# Altium PCB PCB.PcbDoc
Units mm, origin at the board's own origin, x right, y up, seen from the top; angles counter-clockwise.
Board outline 17.81 x 15.52 mm, 2 copper layers (Top Layer, Bottom Layer); 21 components, 29 nets, 79 pads, 23 vias.
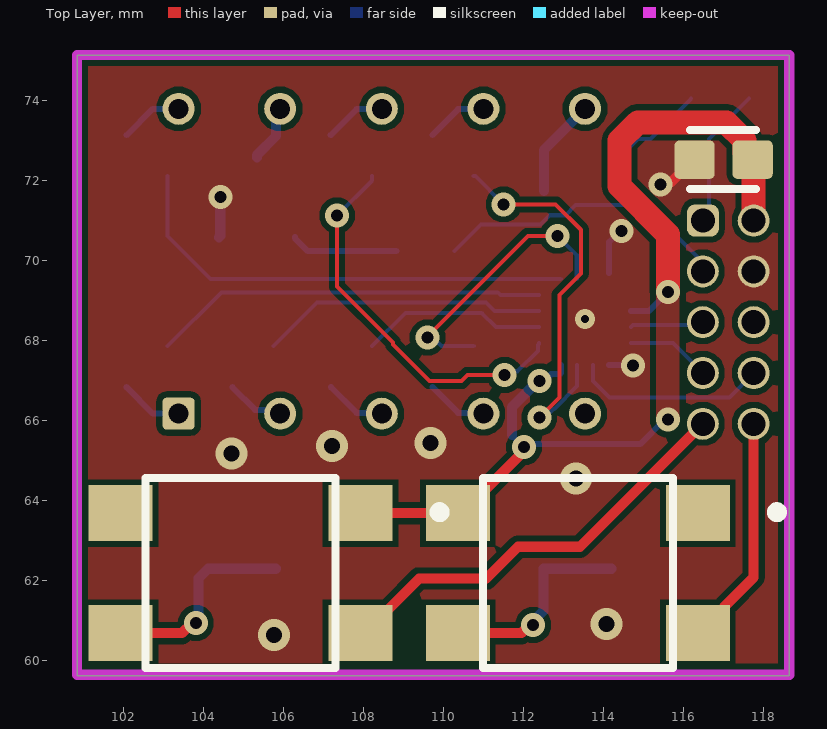
[diagram p0: Top Layer view]
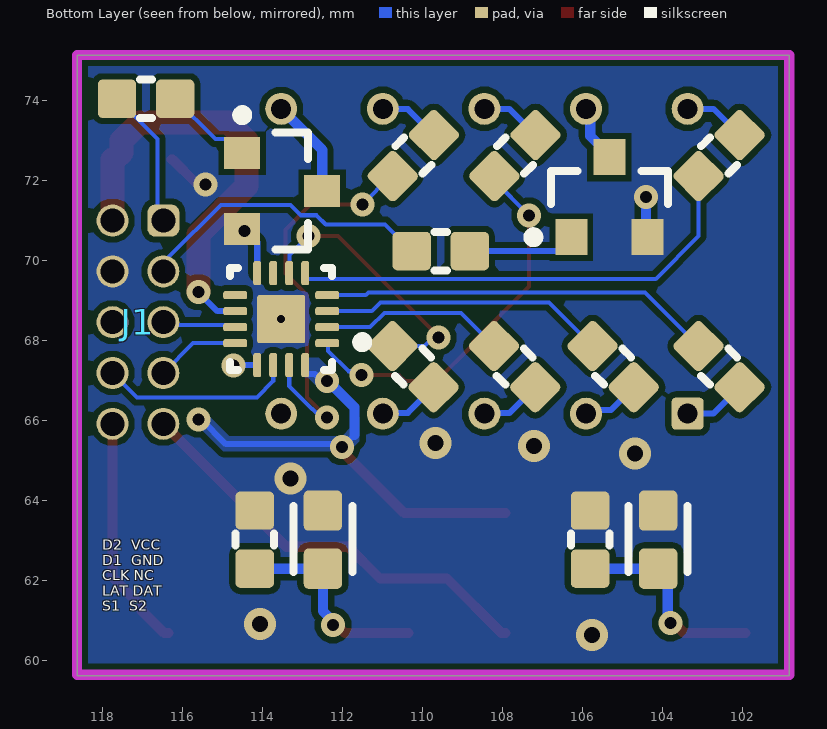
[diagram p1: Bottom Layer view, seen from below]
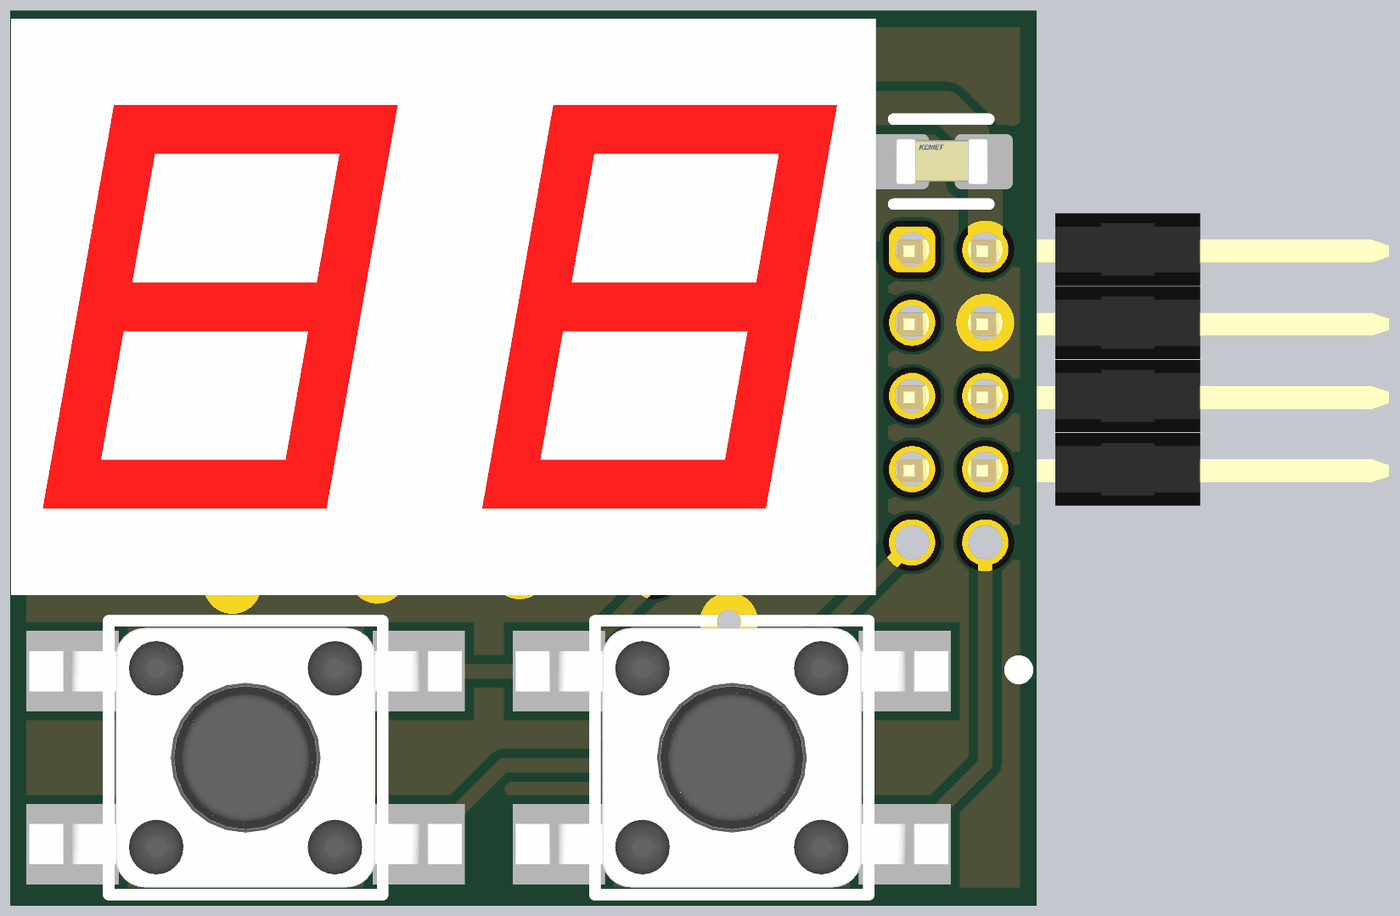
[diagram p2: 3D render of the assembled board from above, using the file's embedded part models]
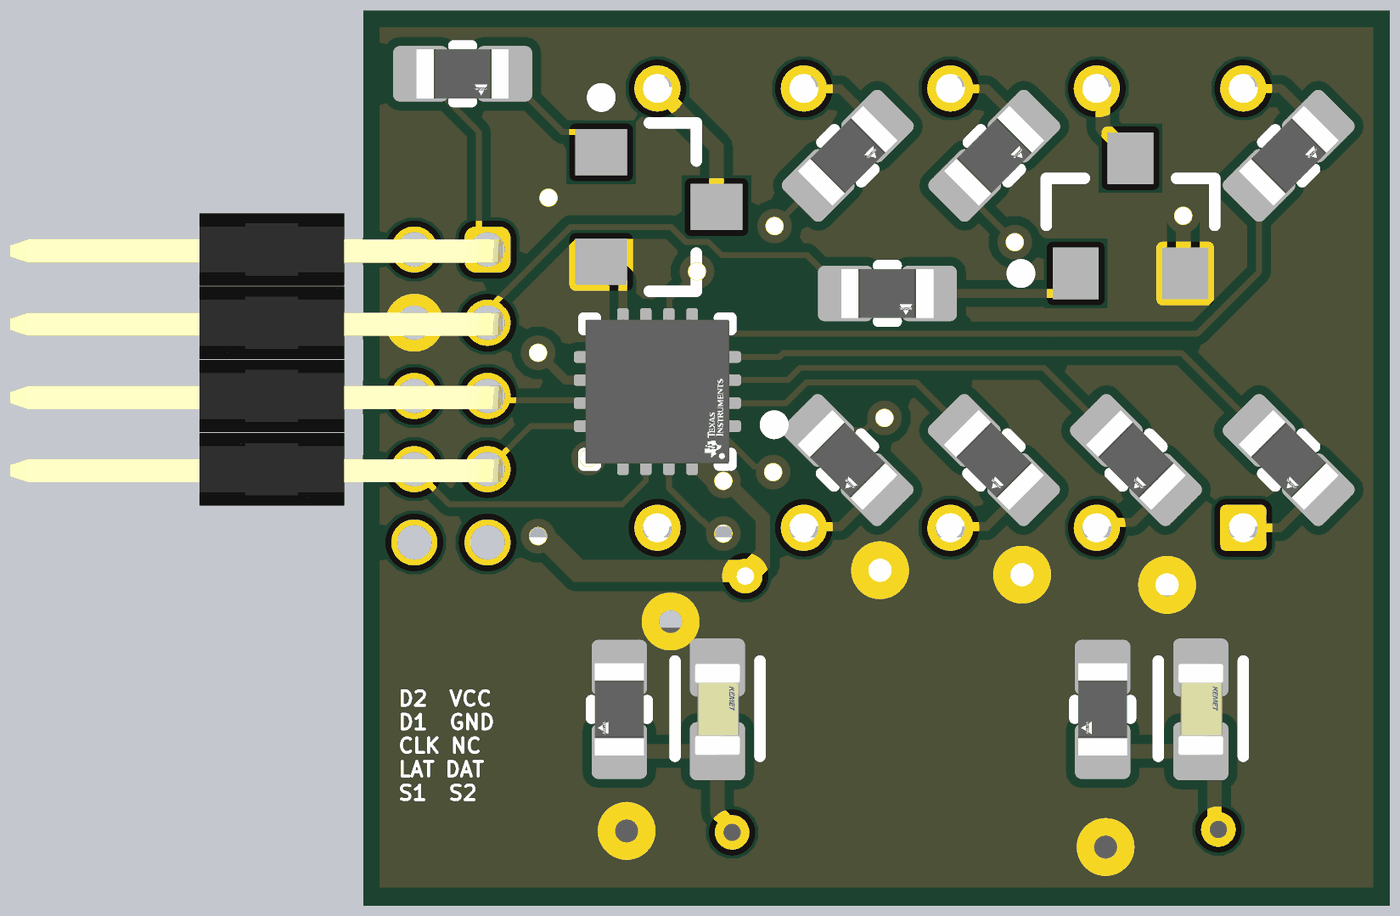
[diagram p3: 3D render of the assembled board from below, using the file's embedded part models]

## Layer stack, top to bottom
Top Solder: solder mask 0.0102, Solder Resist, Dk 3.5
Top Layer: signal copper 0.0356
Dielectric 1: dielectric 0.32, FR-4, Dk 4.8
Bottom Layer: signal copper 0.0356
Bottom Solder: solder mask 0.0102, Solder Resist, Dk 3.5

## Board outline
100.838,59.614 118.643,59.614 118.643,75.133 100.838,75.133

## Design rules (kind name [scope] priority, off if disabled: settings)
Clearance [All] p1: gap=0.152 ignorepadtopadclearanceinfootprint=TRUE
PolygonConnect [All] p1: connectstyle=Direct reliefconductorwidth=0.254 reliefentries=4 polygonreliefangle="90 Angle" airgapwidth=0.254
RoutingVias [All] p1: holewidth=0.3 width=0.6 viastyle="Through Hole" minholewidth=0.3 minwidth=0.6 maxholewidth=1 maxwidth=1.5
SolderMaskExpansion [All] p1: expansion=0.102 istentingtop=FALSE
UnRoutedNet [All] p1: checkbadconnections=TRUE
Width [All] p1: maxlimit=1.27 minlimit=0.102 preferedwidth=0.152
29 further rules are at their usual default settings.

## Components (designator, comment, footprint, x,y, rotation, side; value= is the part's Value field where it differs from the comment)
C1 "1uF" C0603C-IPC_B 117.003,72.517 r0 top
C2 "?F" C0603C-IPC_B 104.115,63.017 r270 bottom
C3 "?F" C0603C-IPC_B 112.497,63.017 r270 bottom
D1 "7SEG_028_DUAL_CC" 7SEG_2DIGIT_028INCH 103.378,66.167 r0 top locked
J1 "HDRM_2x5_127_90" HDRM_2x05J_90 116.484,70.993 r0 bottom
Q1 "BC817-16LT1G" ONSC-SOT-23-3-318-08_V 105.334,71.577 r90 bottom
Q2 "BC817-16LT1G" ONSC-SOT-23-3-318-08_V 113.513,71.73 r180 bottom
R1 "RC-0603" RC0603-IPC_B 110.236,72.619 r135 bottom
R2 "RC-0603" RC0603-IPC_B 107.696,72.619 r135 bottom
R3 "RC-0603" RC0603-IPC_B 107.702,67.341 r225 bottom
R4 "RC-0603" RC0603-IPC_B 105.238,67.341 r225 bottom
R5 "RC-0603" RC0603-IPC_B 102.591,67.341 r225 bottom
R6 "RC-0603" RC0603-IPC_B 102.591,72.619 r135 bottom
R7 "RC-0603" RC0603-IPC_B 110.242,67.341 r225 bottom
R8 "RC-0603" RC0603-IPC_B 109.55,70.231 r180 bottom
R9 "RC-0603" RC0603-IPC_B 116.916,74.041 r180 bottom
R10 "RC-0603" RC0603-IPC_B 105.816,63.017 r270 bottom
R11 "RC-0603" RC0603-IPC_B 114.198,63.017 r270 bottom
SW1 "Tactile 4.5x4.5" Tactile_45x45_SMD 104.927,62.179 r180 top
SW2 "Tactile 4.5x4.5" Tactile_45x45_SMD 113.36,62.179 r180 top
U1 "SN74HC595BRWNR" FP-RWN0016A-MFG 113.538,68.529 r0 bottom

## Footprints (in the part's own frame and the unit in brackets; to place one, negate y for a bottom-side part, rotate by r counter-clockwise, add the part's x,y. Pads: shape width x height; smd on the part's side, far side on the other; paste and mask are expansions set on the pad)
7SEG_2DIGIT_028INCH [mm]
  rrect25% 0.8x0.8 hole 0.5: 1(0,0)
  round 0.8 hole 0.5: 2(2.54,0) 3(5.08,0) 4(7.62,0) 5(10.16,0) 6(10.16,7.62) 7(7.62,7.62) 8(5.08,7.62) 9(2.54,7.62) 10(0,7.62)
  body extent -2.52,-1.17 12.48,8.83, height 6.2
C0603C-IPC_B [mm] "Chip Capacitor, 2-Leads, Body 1.60x0.80mm, IPC Medium Density"
  rrect25% 1.007x0.958 smd paste+0 mask+0: 1(-0.726,0) 2(0.726,0)
  silkscreen extent -0.84,-0.74 0.81,0.74, body extent -0.8,-0.4 0.8,0.4, height 0.87
FP-RWN0016A-MFG [mm]
  rrect50% 0.6x0.2 smd paste+0 mask+0: 1(-1.15,0.6) 2(-1.15,0.2) 3(-1.15,-0.2) 4(-1.15,-0.6) 9(1.15,-0.6) 10(1.15,-0.2) 11(1.15,0.2) 12(1.15,0.6)
  rrect50% 0.2x0.6 smd paste+0 mask+0: 5(-0.6,-1.15) 6(-0.2,-1.15) 7(0.2,-1.15) 8(0.6,-1.15) 13(0.6,1.15) 14(0.2,1.15) 15(-0.2,1.15) 16(-0.6,1.15)
  rrect8% 1.2x1.2 smd paste-1000 mask+0: 17(0,0)
  silkscreen extent -2.15,-1.28 1.28,1.28, body extent -1.25,-1.25 1.25,1.25, height 0.5
HDRM_2x05J_90 [mm] "Gold 250V 1A Shrouded Square Pins 1mm 260? 4mm -40?~+105? 6 1.27mm Brass Black 2x5P 1.27mm Push-Pull,P=1.27mm Pin Headers ROHS"
  rrect50% 0.8x0.8 hole 0.6: 1(0,0)
  round 0.8 hole 0.6: 2(1.27,0) 3(0,1.27) 4(1.27,1.27) 5(0,2.54) 6(1.27,2.54) 7(0,3.81) 8(1.27,3.81) 9(0,5.08) 10(1.27,5.08)
  body extent -0.25,-0.63 8.28,4.44, height 5.47
ONSC-SOT-23-3-318-08_V [mm] "SOT23, 3-Leads, Body 2.92x1.3mm, Pitch 0.95mm"
  rect 0.9x0.8 smd: 1(-1,0.95) 2(-1,-0.95) 3(1,0)
  silkscreen extent -1.12,-1.46 0.65,2.03, body extent -0.65,-1.46 0.65,1.46, height 1.11
RC0603-IPC_B [mm] "Chip Resistor, 2-Leads, Body 1.65x0.95mm, IPC Medium Density"
  rrect25% 0.958x0.962 smd paste+0 mask+0: 1(-0.727,0) 2(0.727,0)
  silkscreen extent -0.15,-0.48 0.15,0.48, body extent -0.8,-0.42 0.8,0.42, height 0.55
Tactile_45x45_SMD [mm]
  rect 1.6x1.4 smd paste+0 mask+0: 1(-3,-1.5) 2(3,-1.5) 3(-3,1.5) 4(3,1.5)
  silkscreen extent -5.1,-2.37 2.37,2.37, body extent -4.5,-2.47 4.5,2.47, height 0.25

## Part data
C1: library part Cap_0603, "0603 Multilayer Ceramic Capacitors MLCC - SMD/SMT ROHS", Voltage Rated=25V
C2 C3: library part Cap_0603, "0603 Multilayer Ceramic Capacitors MLCC - SMD/SMT ROHS", Voltage Rated=?V
D1: library part 2821AS, "Common-Cathode (CC)", Datasheet=https://www.thegioiic.com/sn410281n-led-7-doan-0-28inch-do-2-so-duong-chung
J1: "Gold 250V 1A Shrouded Square Pins 1mm 260? 4mm -40?~+105? 6 1.27mm Brass Black 2x5P 1.27mm Push-Pull,P=1.27mm Pin Headers ROHS"
Q1 Q2: library part CMP-1048-00736-1, "General Purpose Transistor, NPN Silicon, 3-Pin SOT-23, Pb-Free, Tape and Reel", Manufacturer="On Semiconductor", ComponentLink1Description="Manufacturer URL", ComponentLink1URL=http://www.onsemi.com/, ComponentLink2Description=Datasheet, ComponentLink2URL=http://www.onsemi.com/pub_link/Collateral/BC817-16LT1-D.PDF, ComponentLink3Description="Package Specification", ComponentLink3URL=http://www.onsemi.cn/pub_link/Collateral/318-08.PDF, DatasheetVersion="Rev. 12", fT Min (MHz)=100, IC Continuous (A)=0.5, Mounting Technology="Surface Mount", PackageDescription="3-Pin Small Outline Transistor, Body 2.92 x 1.3 mm, Pitch 0.95 mm", PackageReference=SOT-23-3-318-08, PackageVersion="Rev. AP, 11/2009", Packing="Tape and Reel", PartNumber=BC817-16LT1G, Polarity=NPN, RoHS=TRUE
R1 R2 R3 R4 R5 R6 R7: "±1% 0603 Chip Resistor - Surface Mount ROHS", Operating Temperature Range=-55℃~+155℃, Package=0603, Power(Watts)=100mW, Resistance=470R, Tolerance=±1%, Type="Thick Film Resistors"
R8 R9 R10 R11: "±1% 0603 Chip Resistor - Surface Mount ROHS", Operating Temperature Range=-55℃~+155℃, Package=0603, Power(Watts)=100mW, Resistance=4.7K, Tolerance=±1%, Type="Thick Film Resistors"
SW1 SW2: "SWITCH TACTILE SPST-NO 50MA 12V", Max Operating Temperature=70°C, Min Operating Temperature=-20°C, Operating Force=160gf, Actuator Type=Standard, Illumination Type=Non-Illuminated, Lead Free="Lead Free", Mechanical Life=500000Cycles, Mount="Surface Mount", Packaging="Tape and Reel", Switch Function=Off-Mom, Switch Travel=0.2mm, Termination="Gull Wing", Throw Configuration=SPST
U1: library part CMP-04904-000008-1, "IC SHIFT REGISTER 8BIT 16X1QFN", Max Operating Temperature=125°C, Max Supply Voltage=6V, Min Operating Temperature=-55°C, Min Supply Voltage=2V, Lead Free="Lead Free", Logic Function="Shift Register", Mount="Surface Mount", Number of Bits per Element=8, Number of Elements=1, Number of Pins=16, Packaging="Cut Tape", REACH SVHC="No SVHC", RoHS Compliant=Yes

## Via types
v1: diameter 0.6, hole 0.3, Top Layer to Bottom Layer, tented both sides, 13 vias
v2: diameter 0.8, hole 0.4, Top Layer to Bottom Layer, 6 vias
v3: diameter 0.6, hole 0.3, Top Layer to Bottom Layer, 3 vias
v4: diameter 0.5, hole 0.2, Top Layer to Bottom Layer, 1 vias

## Nets (pads, with @x,y where several pads share a name; then routed paths per layer and width w, separated by ;. In a path a pad name is that pad's centre, name@x,y a point inside that pad or via, vN(x,y) a via of type N, cw(c..) or ccw(c..) an arc to the next point about the centre after c; other vN are vias at no path point)
CLK_1: J1.5 U1.11 | length 1.8
  Bottom Layer w0.102: U1.11 114.737,68.378 116.41,68.378 J1.5
D1_1: J1.3 R8.1 | length 7.5
  Bottom Layer w0.102: R8.1 110.942,70.896 112.425,70.896 112.655,71.126 113.047,71.126 113.303,71.383 115.047,71.383 116.351,70.079 116.351,69.857 J1.3
D2_1: J1.1 R9.1 | length 3.5
  Bottom Layer w0.102: J1.1 116.634,71.142 116.634,73.031 R9.1
DATA_1: J1.8 U1.14 | length 4.8
  Bottom Layer w0.102: U1.14 113.738,66.983 114.148,66.573 117.145,66.573 J1.8
GND: C1.1 C2.1 C3.1 J1.4 Q1.2 Q2.2 R10.1 R11.1 U1.8 U1.13 U1.17 | length 4.1
  Top Layer w0.254: v1(115.428,71.892) 115.494,71.958 115.694,71.958 116.253,72.517 C1.1
  Bottom Layer w0.152: U1.13 114.732,67.379 v1(114.732,67.377) ; U1.8 114.138,70.455 114.463,70.78 Q2.2 114.493,70.78 v1(114.452,70.739)
  Bottom Layer w0.254: Q1.2 104.419,70.613 v1(104.419,71.577)
  other v2: 105.766,60.63 114.071,60.909 113.309,64.541 104.699,65.176 107.213,65.354 109.677,65.43
  other v4: 113.538,68.529
LATCH_1: J1.7 U1.12 | length 2.1
  Bottom Layer w0.102: U1.12 115.738,67.929 J1.7
NetC2_2: C2.2 R10.2 SW1.4 | length 5.2
  Top Layer w0.254: SW1.4 103.461,60.679 103.716,60.935 v3(103.81,60.935)
  Bottom Layer w0.254: v3(103.81,60.935) 103.876,61.001 103.876,62.053 C2.2 C2.2 R10.2
NetC3_2: C3.2 R11.2 SW2.4 | length 5.2
  Top Layer w0.254: SW2.4 111.944,60.679 112.149,60.884 v3(112.243,60.884)
  Bottom Layer w0.254: v3(112.243,60.884) 112.243,60.977 112.497,61.231 C3.2 C3.2 R11.2
NetD1_1: D1.1 R5.2 | length 1.6
  Bottom Layer w0.152: R5.2 102.737,66.167 D1.1
NetD1_2: D1.2 R4.2 | length 1.5
  Bottom Layer w0.152: R4.2 105.289,66.262 105.823,66.262 D1.2
NetD1_3: D1.3 R3.2 | length 1.5
  Bottom Layer w0.152: R3.2 107.829,66.186 108.439,66.186 D1.3
NetD1_4: D1.4 R7.2 | length 1.5
  Bottom Layer w0.152: R7.2 110.369,66.186 110.979,66.186 D1.4
NetD1_6: D1.6 Q2.3 | length 2.5
  Bottom Layer w0.254: Q2.3 112.513,72.762 D1.6
NetD1_7: D1.7 R1.2 | length 1.5
  Bottom Layer w0.152: R1.2 110.369,73.78 110.991,73.78 D1.7
NetD1_8: D1.8 R2.2 | length 1.5
  Bottom Layer w0.152: R2.2 107.829,73.78 108.451,73.78 D1.8
NetD1_9: D1.9 Q1.3 | length 1.5
  Bottom Layer w0.254: Q1.3 105.334,72.627 105.814,73.107 105.814,73.683 D1.9
NetD1_10: D1.10 R6.2 | length 1.6
  Bottom Layer w0.152: R6.2 102.731,73.787 D1.10
NetQ1_1: Q1.1 R8.2 | length 2.7
  Bottom Layer w0.152: Q1.1 106.284,70.555 106.608,70.231 R8.2
NetQ2_1: Q2.1 R9.2 | length 2.2
  Bottom Layer w0.102: Q2.1 114.862,73.029 115.179,73.029 116.189,74.039 R9.2
NetR1_1: R1.1 U1.15 | length 10.2
  Top Layer w0.102: v1(111.506,71.399) 112.801,71.399 113.436,70.764 113.436,69.672 112.898,69.134 112.898,66.568 v1(112.395,66.065)
  Bottom Layer w0.102: R1.1 110.801,72.105 v1(111.506,71.399) ; v1(112.395,66.065) 112.53,66.065 112.752,66.288 112.77,66.288 113.338,66.856 U1.15
NetR2_1: R2.1 U1.1 | length 9.7
  Top Layer w0.102: v1@107.404,71.12 v1(107.34,71.12) 107.34,69.342 108.737,67.945 108.737,67.894 109.651,66.98 110.448,66.98 110.6,67.132 v1(111.531,67.132)
  Bottom Layer w0.102: v1(107.34,71.12) 108.21,71.99 R2.1 ; v1(111.531,67.132) 111.627,67.228 111.855,67.228 112.364,67.736 112.364,67.88 112.388,67.904 U1.1
NetR3_1: R3.1 U1.2 | length 4.7
  Bottom Layer w0.102: R3.1 109.049,68.688 110.956,68.688 111.315,68.329 U1.2
NetR4_1: R4.1 U1.3 | length 7.2
  Bottom Layer w0.102: R4.1 106.839,68.942 111.061,68.942 111.274,68.729 U1.3
NetR5_1: R5.1 U1.4 | length 9.9
  Bottom Layer w0.102: R5.1 104.445,69.196 111.357,69.196 111.424,69.129 U1.4
NetR6_1: R6.1 U1.5 | length 11.8
  Bottom Layer w0.102: R6.1 103.105,70.606 104.174,69.536 U1.5@112.931,69.536
NetR7_1: R7.1 U1.6 | length 6.8
  Top Layer w0.102: v1(109.601,68.072) 109.601,68.097 112.116,70.612 v1(112.852,70.612)
  Bottom Layer w0.102: v1(109.601,68.072) 109.736,68.072 109.951,67.857 110.755,67.857 R7.1 ; v1(112.852,70.612) 113.331,70.133 U1.6@113.331,69.536
SW1_1: J1.9 SW1.3 | length 10.7
  Top Layer w0.254: SW1.3 108.027,60.679 109.394,62.046 111.068,62.046 111.862,62.84 113.411,62.84 J1.9
SW2_1: J1.10 SW2.3 | length 5.9
  Top Layer w0.254: SW2.3 116.46,60.679 117.033,61.252 117.033,61.352 117.754,62.073 J1.10
VCC: C1.2 J1.2 SW1.1 SW2.2 U1.10 U1.16 | length 22.5
  Top Layer w0.254: SW1.1 SW2.2 110.46,63.679 111.948,65.167 111.948,65.263 v3(112.014,65.329)
  Top Layer w0.6: v1(115.608,69.202) 115.608,70.647 114.402,71.854 114.402,72.992 114.858,73.449 117.07,73.449 117.526,72.992 117.526,72.696 117.705,72.517 117.754,72.517 J1.2
  Bottom Layer w0.152: 111.709,65.634 111.938,65.405 114.921,65.405 v1@115.538,66.022 ; v1@112.359,66.98 v1(112.395,66.98) 112.516,66.98 112.691,67.155 112.914,67.155 112.938,67.179 U1.16 ; U1.10 115.135,68.729 v1(115.608,69.202)
  Bottom Layer w0.254: 111.709,65.634 111.709,66.33 v1@112.359,66.98
  other v1: 115.608,66.022
pads on no net: D1.5 J1.6 SW1.2 SW2.1 U1.7 U1.9

## Polygon pours and split planes (outlines as drawn)
GND on Bottom Layer "GND_L02_P006" (solid, pour order 6): 100.838,59.639 118.643,59.639 118.643,75.133 100.838,75.133
VCC on Bottom Layer "VCC_L02_P004" (solid, pour order 4): 111.785,65.837 112.014,65.608 114.833,65.608 115.494,66.269 115.646,66.269 115.799,66.116 115.799,65.964 115.57,65.735 115.494,65.735 114.986,65.227 114.96,65.227 111.836,65.227 111.582,65.481 111.582,66.243 111.785,66.04
GND on Bottom Layer "GND_L02_P003" (solid, pour order 3): 114.049,69.614 114.049,69.335 113.77,69.055 113.77,68.979 113.922,68.827 114.049,68.827 114.125,68.903 114.125,68.979 114.227,69.081 114.227,69.538 114.125,69.639 114.075,69.639
GND on Bottom Layer "GND_L02_P002" (solid, pour order 2): 114.046,67.386 114.046,67.666 113.767,67.945 113.767,68.021 113.919,68.174 114.046,68.174 114.122,68.097 114.122,68.021 114.224,67.92 114.224,67.462 114.122,67.361 114.071,67.361
VCC on Bottom Layer "VCC_L02_P000" (solid, pour order 0): 112.928,67.564 112.598,67.564 112.116,67.081 112.116,66.853 112.268,66.7 112.497,66.7 112.878,67.081 112.954,67.081 112.954,67.539
GND on Top Layer "GND_L01_P007" (solid, pour order 7): 100.838,59.674 118.643,59.674 118.643,75.168 100.838,75.168
VCC on Top Layer "VCC_L01_P005" (solid, pour order 5): 115.316,66.853 115.316,65.964 115.494,65.786 115.672,65.786 115.9,66.015 115.9,66.599 115.9,69.291 115.748,69.444 115.494,69.444 115.316,69.266

## Keep-outs
Keep-Out Layer:
  lines w0.254: 100.838,59.639 100.838,75.133 118.643,75.133 118.643,59.639 100.838,59.639

## Silkscreen, mask and mechanical layers (free items; w line width, h text height)
Bottom Overlay:
  text "D2  VCC / D1  GND / CLK NC / LAT DAT / S1  S2" at 118.008,61.239 h0.25